# Altium PCB PCB2.PcbDoc
Units mm, origin at the board's own origin, x right, y up, seen from the top; angles counter-clockwise.
Board outline 56.39 x 61.85 mm, 2 copper layers (Top Layer, Bottom Layer); 8 components, 12 nets, 71 pads, 2 vias.
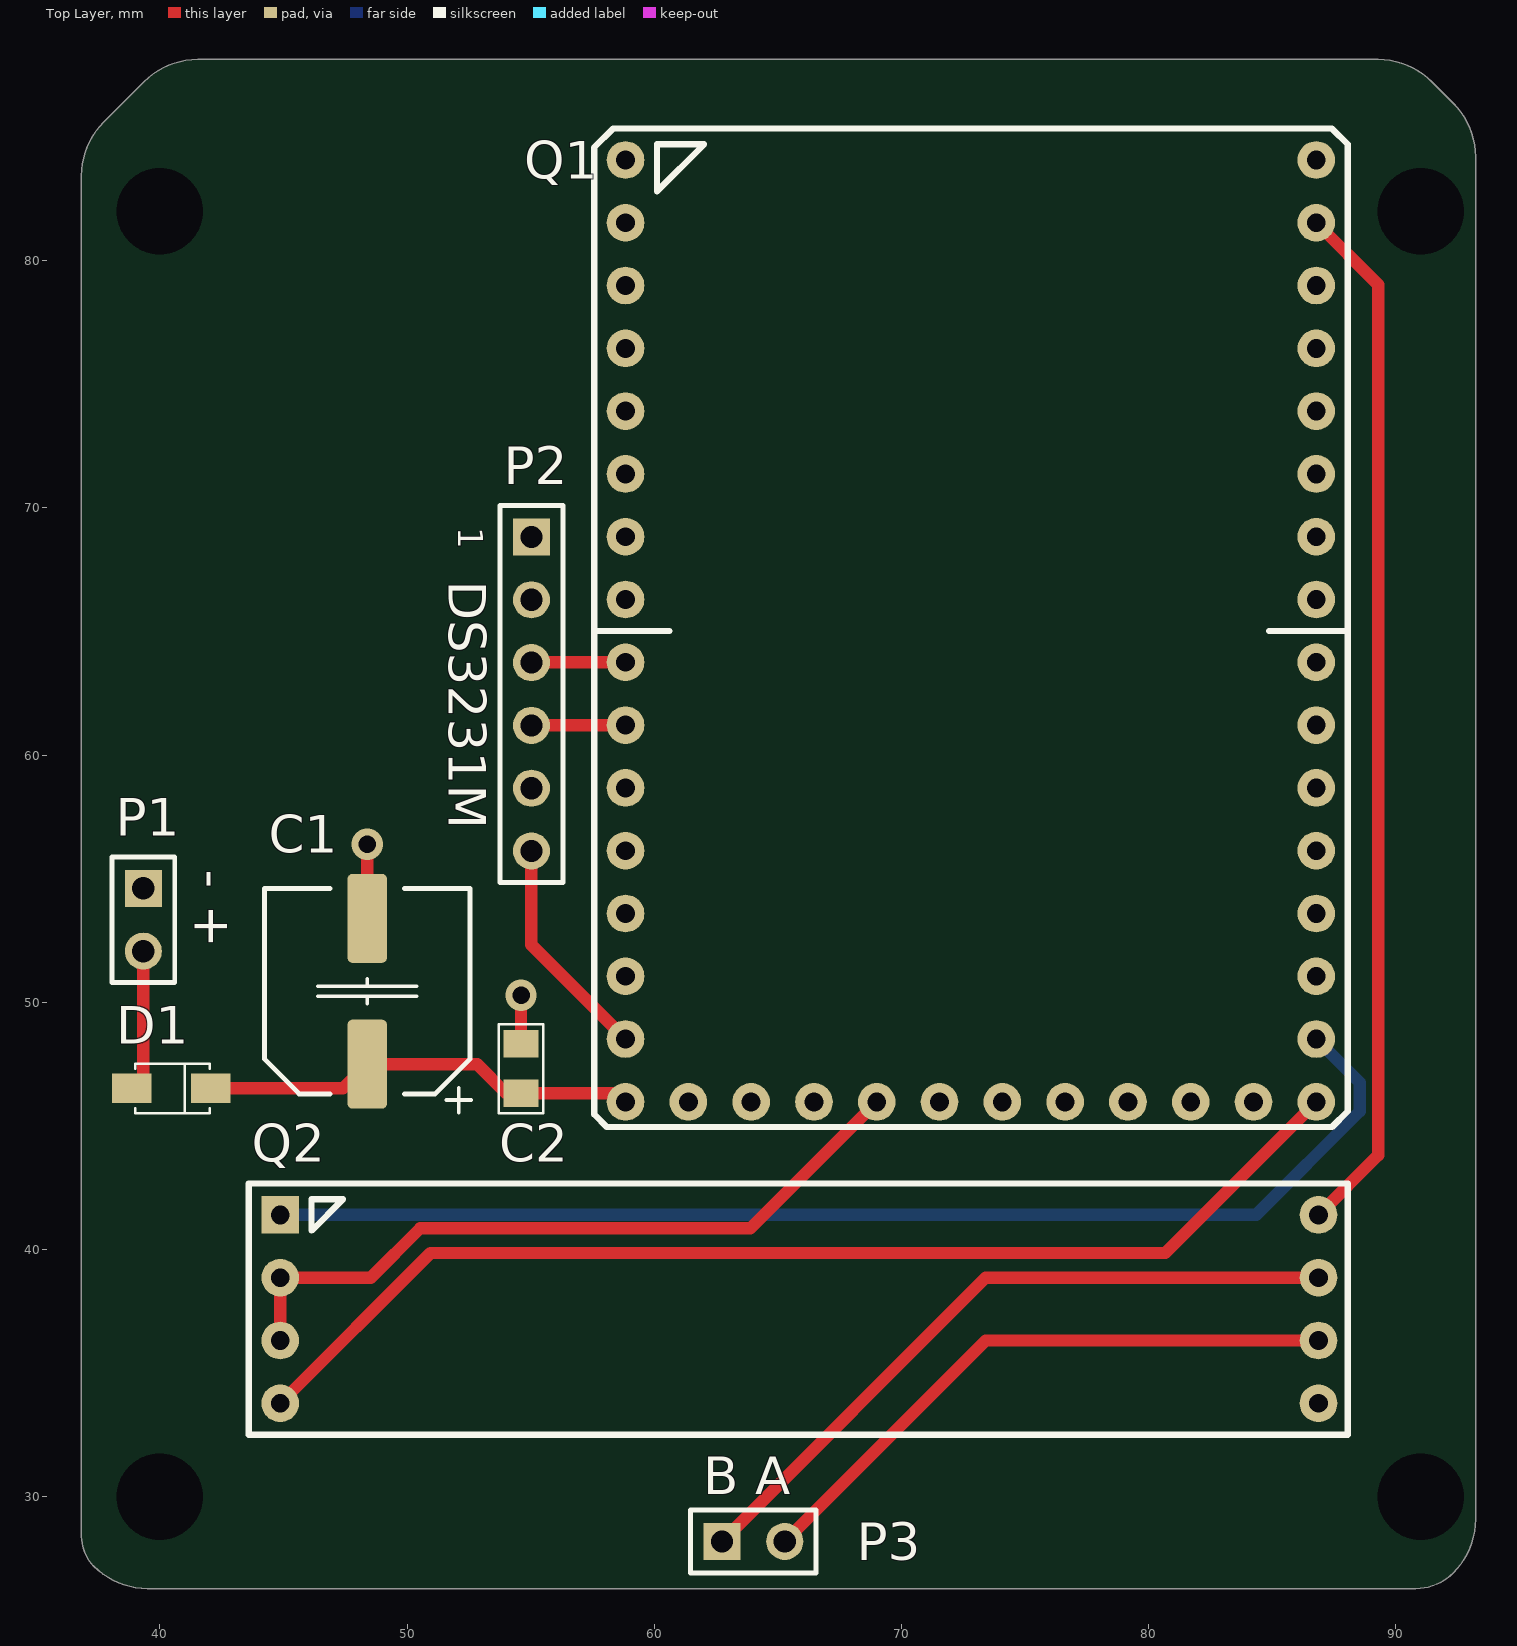
[diagram p0: Top Layer view]
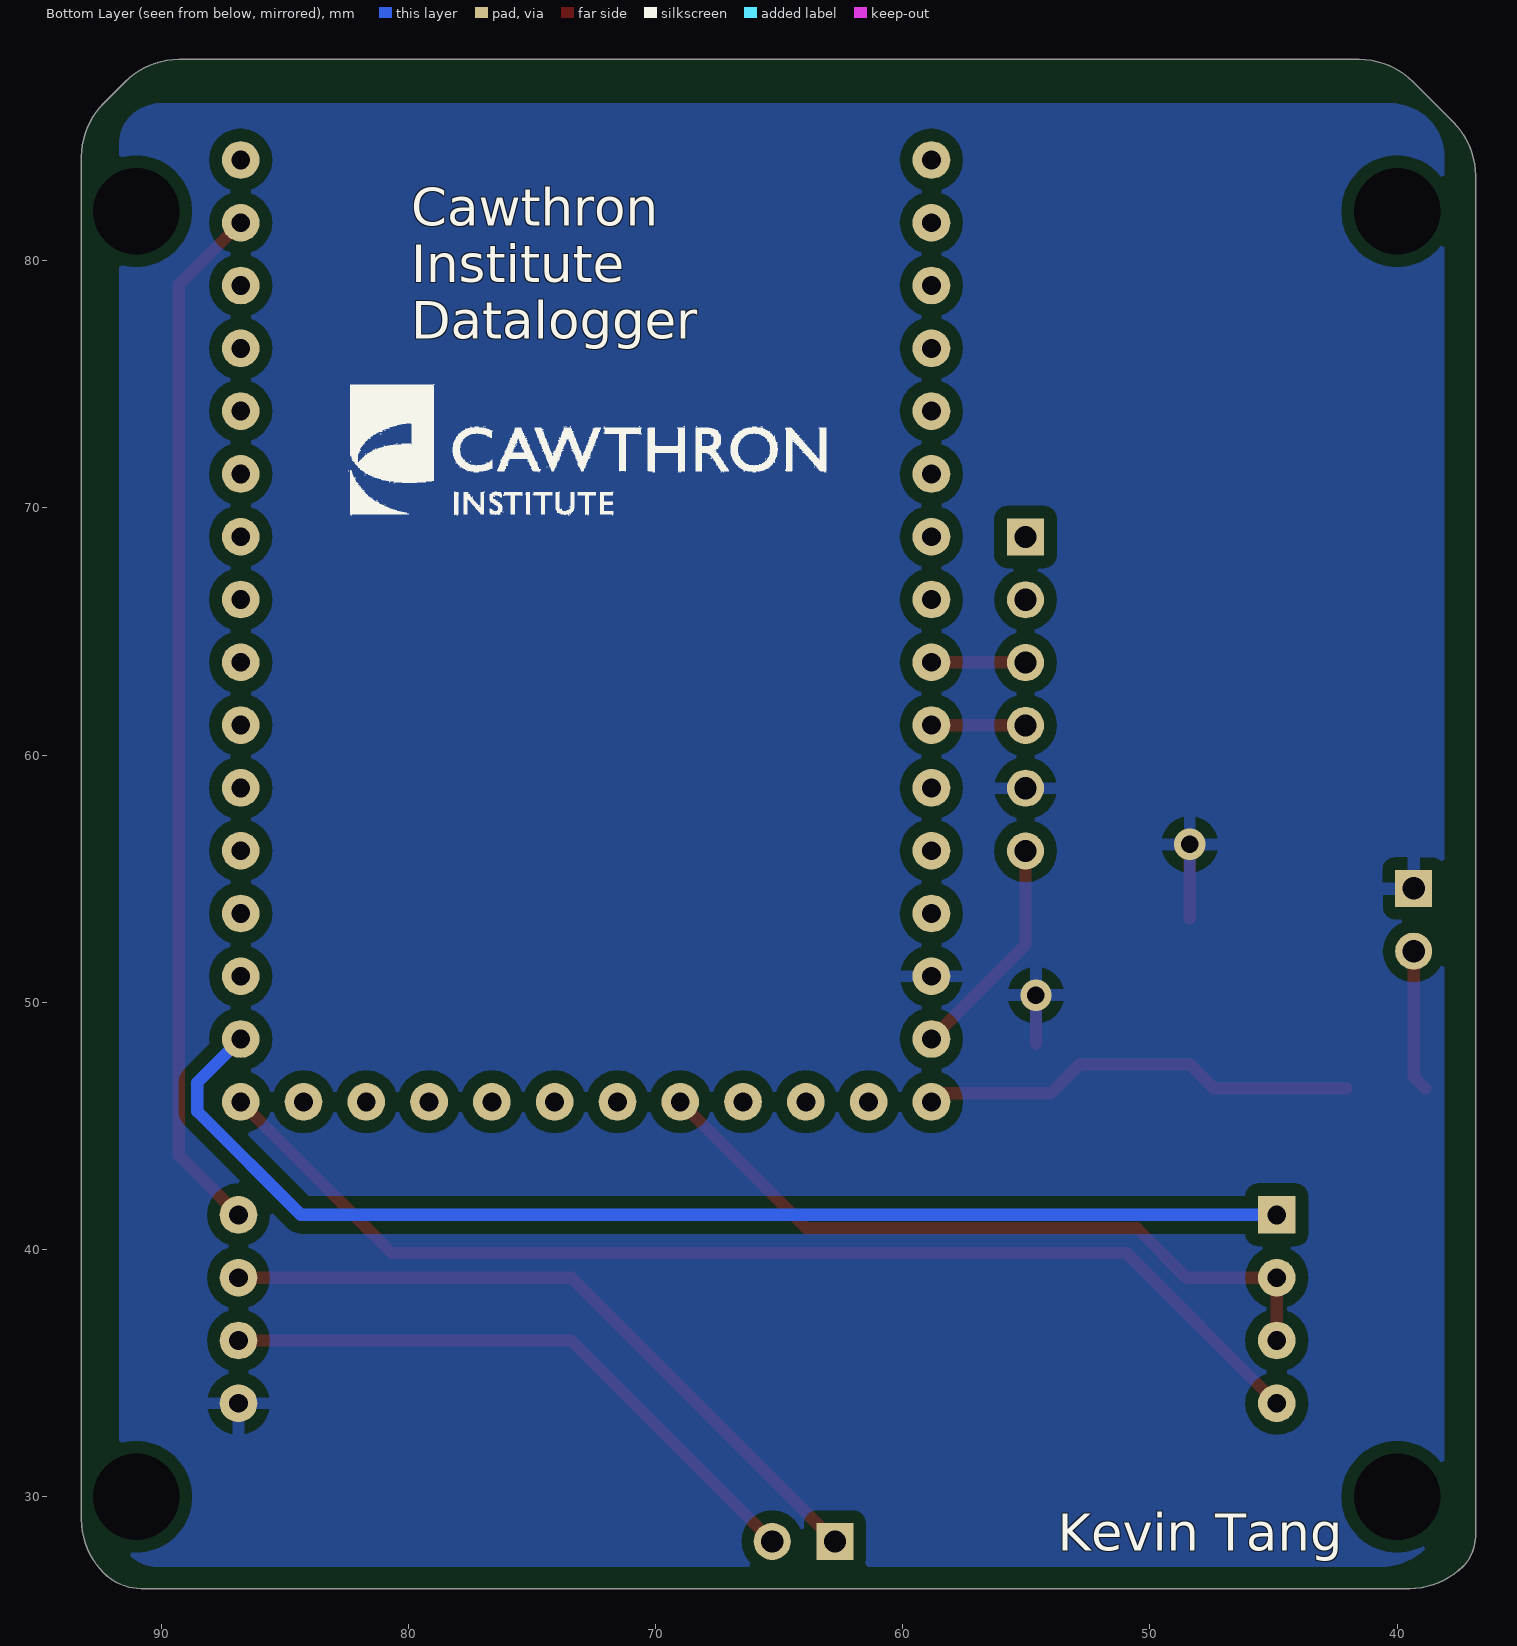
[diagram p1: Bottom Layer view, seen from below]

## Layer stack, top to bottom
Top Solder: solder mask 0.0102, Solder Resist, Dk 3.5
Top Layer: signal copper 0.0356
Dielectric 1: dielectric 0.32, FR-4, Dk 4.8
Bottom Layer: signal copper 0.0356
Bottom Solder: solder mask 0.0102, Solder Resist, Dk 3.5

## Board outline
37.329,27.187 cw(c38.534,28.392) 36.83,28.392 36.83,83.439 cw(c39.896,83.439) 37.728,85.607 39.361,87.24 cw(c41.529,85.072) 41.529,88.138 89.281,88.138 cw(c89.281,85.072) 91.449,87.24 92.32,86.369 cw(c90.152,84.201) 93.218,84.201 93.218,29.083 cw(c90.152,29.083) 92.32,26.915 cw(c90.809,28.426) 90.809,26.289 39.497,26.289 cw(c39.497,29.355)

## Design rules (kind name [scope] priority, off if disabled: settings)
Clearance [All] p1: gap=0.5 ignorepadtopadclearanceinfootprint=FALSE
HoleSize [All] p1: absolutevalues=TRUE maxlimit=6 minlimit=0.025 maxpercent=80.000 minpercent=20.000
PolygonConnect [All] p1: connectstyle=Relief reliefconductorwidth=0.5 reliefentries=4 polygonreliefangle="90 Angle" airgapwidth=0.5
RoutingVias [All] p1: holewidth=0.7 width=1.7 viastyle="Through Hole" minholewidth=0.6 minwidth=1.2 maxholewidth=1 maxwidth=2.2
SilkToSilkClearance [All] p1: silktosilkclearance=0.1
SilkToSolderMaskClearance [IsPad] p1: minsilkscreentomaskgap=0.1 clearancetoexposedcopper=TRUE
SolderMaskExpansion [All] p1: expansion=0.102
Width [All] p1: maxlimit=0.7 minlimit=0.5 preferedwidth=0.5
27 further rules are at their usual default settings.

## Components (designator, comment, footprint, x,y, rotation, side; value= is the part's Value field where it differs from the comment)
C1 "CAP ALUM 22UF 20% 50V SMD" "CAP POL 8x5.4mm SMT" 48.387,50.448 r90 top
C2 "100nF" "0805 CAP" 54.61,47.322 r90 top
D1 "1N4148W-7-F" SOD123 40.513,46.522 r0 top
P1 "Battery" HDR1X2 39.331,54.61 r270 top
P2 "DS3231M" HDR1X6 55.03,68.822 r270 top
P3 "A/B Connector" HDR1X2 62.738,28.194 r0 top
Q1 "PYBv1.1" PCBComponent_1#1 58.838,45.974 r0 top
Q2 "TTL to RS485" PCBComponent_1#2 44.868,33.782 r0 top

## Footprints (in the part's own frame and the unit in brackets; to place one, negate y for a bottom-side part, rotate by r counter-clockwise, add the part's x,y. Pads: shape width x height; smd on the part's side, far side on the other; paste and mask are expansions set on the pad)
"0805 CAP" [mm] "http://www.digikey.co.nz/Web%20Export/Supplier%20Content/Vishay_8026/PDF/VishayBeyschlag_SolderPad.pdf?redirected=1 with dimension G modified by +0.25mm"
  rect 1.1x1.4 smd: 1(-1,0) 2(1,0)
  silkscreen extent -1.8,-0.9 1.8,0.9, body extent -1.04,-0.66 1.04,0.66, height 0.61
"CAP POL 8x5.4mm SMT" [mm]
  round 0.508 on Mech15: 0(0,0)
  rrect25% 3.6x1.6 smd: 1(-2.95,0) 2(2.95,0)
  silkscreen extent -4.9,-4.2 4.15,4.15, body extent -4.5,-4.15 4.5,4.15, height 5.4
HDR1X2 [mm] "Connector; Header; 2 Position"
  rect 1.5x1.5 hole 0.9: 1(0,0)
  round 1.5 hole 0.9: 2(2.54,0)
  silkscreen extent -1.27,-1.27 3.81,1.27
HDR1X6 [mm] "Connector; Header; 6 Position"
  rect 1.5x1.5 hole 0.9: 1(0,0)
  round 1.5 hole 0.9: 2(2.54,0) 3(5.08,0) 4(7.62,0) 5(10.16,0) 6(12.7,0)
  silkscreen extent -1.27,-1.27 13.97,1.27
PCBComponent_1#1 [mil]
  round 60 hole 30: 1(0,1500) 2(0,1400) 3(0,1300) 4(0,1200) 5(0,1100) 6(0,1000) 7(0,900) 8(0,800) 9(0,700) 10(0,600) 11(0,500) 12(0,400) 13(0,300) 14(0,200) 15(0,100) 16(0,0) 17(1100,1500) 18(1100,1400) 19(1100,1300) 20(1100,1200) 21(1100,1100) 22(1100,1000) 23(1100,900) 24(1100,800) 25(1100,700) 26(1100,600) 27(1100,500) 28(1100,400) 29(1100,300) 30(1100,200) 31(1100,100) 32(1100,0) 33(100,0) 34(200,0) 35(300,0) 36(400,0) 37(500,0) 38(600,0) 39(700,0) 40(800,0) 41(900,0) 42(1000,0)
  silkscreen extent -50,-40 1150,1550
PCBComponent_1#2 [mil]
  rect 60x60 hole 30: 1(0,300)
  round 60 hole 30: 2(0,200) 4(0,0) 5(1653.54,300) 6(1653.54,200) 7(1653.54,100) 8(1653.54,0)
  round 60 hole 30 mask+4: 3(0,100)
  silkscreen extent -50,-50 1700,350
SOD123 [mm] "SOD-123; 2 Leads; Body 2.7 x 1.6 mm, (LxW)"
  rect 1.6x1.2 smd: 1(-1.65,0) 2(1.55,0)
  silkscreen extent -1.5,-1 1.5,1, body extent -1.8,-0.86 1.8,0.86, height 1.21

## Part data
C1: library part "SMT-CAP 22uF/35V SM", Capacitance 1="47 µF", ESR (Equivalent Series Resistance)=-, Lifetime @ Temp.="2000 Hrs @ 85°C", Manufacturer=Nichicon, Manufacturer Part Number=UWX1V220MCL1GB, Operating Temperature="-40°C ~ 85°C", Package / Case="Radial, Can - SMD", Supplier Part Number 1=493-2118-1-ND, Tolerance=±20%, Applications="General Purpose", Category=Capacitors, ComponentLink1Description=http://nichicon-us.com/english/products/pdfs/e-uwx.pdf, ComponentLink1URL=http://nichicon-us.com/english/products/pdfs/e-uwx.pdf, Height - Seated (Max)="0.213\" (5.40mm)", Lead Spacing=-, Mounting Type="Surface Mount", Packaging="Cut Tape (CT)", Part Status=Active, Polarization=Polar, Pricing 1="1=0.59, 10=0.406, 100=0.2304, 500=0.16268 (NZD)", Ratings=-, Revision="July-2002: Re-released for DXP Platform.", RoHS="RoHS Compliant", Size / Dimension="0.248\" Dia (6.30mm)", Stock 1=680, Supplier 1=Digi-Key, Surface Mount Land Size="0.260\" L x 0.260\" W (6.60mm x 6.60mm)"
C2: library part "SMT- Cap", "SMT Capacitor Non Polarised"
D1: library part "SMT-Diode 1N4148W-7-F", "DIODE GEN PURP 100V 300MA SOD123", Base Part Number=1N4148W, Capacitance @ Vr, F="2pF @ 0V, 1MHz", Current - Average Rectified (Io)=150mA, Manufacturer="Diodes Incorporated", Manufacturer Part Number=1N4148W-13-F, Operating Temperature - Junction="-65°C ~ 150°C", Package / Case=SOD-123, Supplier Part Number 1=1N4148W-13FDICT-ND, Category="Discrete Semiconductor Products", ComponentLink1Description=https://www.diodes.com/assets/Datasheets/ds30086.pdf, ComponentLink1URL=https://www.diodes.com/assets/Datasheets/ds30086.pdf, Diode Type=Standard, Mounting Type="Surface Mount", Packaging="Cut Tape (CT)", Part Status=Active, Pricing 1="1=0.33, 10=0.292, 100=0.1586, 500=0.0976, 1000=0.06656 (NZD)", RoHS="RoHS Compliant", Speed="Small Signal =< 200mA (Io), Any Speed", Stock 1=5282, Supplier 1=Digi-Key, Supplier Device Package=SOD-123
P1 P3: library part "Header 2", "Header, 2-Pin", LatestRevisionDate=17-Jul-2002, LatestRevisionNote="Re-released for DXP Platform.", Publisher="Altium Limited"
P2: library part "Header 6", "Header, 6-Pin", LatestRevisionDate=17-Jul-2002, LatestRevisionNote="Re-released for DXP Platform.", Publisher="Altium Limited"
Q1: "Microcontroller"
Q2: "Converter"

## Free pads (board coordinates)
  round 1.524 hole 3.5: 1(40,82) 2(91,82) 3(40,30) 4(91,30)

## Via types
v1: diameter 1.27, hole 0.711, Top Layer to Bottom Layer, 2 vias

## Nets (pads, with @x,y where several pads share a name; then routed paths per layer and width w, separated by ;. In a path a pad name is that pad's centre, name@x,y a point inside that pad or via, vN(x,y) a via of type N, cw(c..) or ccw(c..) an arc to the next point about the centre after c; other vN are vias at no path point)
GND: C1.2 C2.2 P1.1 P2.5 Q1.14 Q2.8 | length 5
  Top Layer w0.5: C1.2 v1(48.387,56.388) ; C2.2 v1(54.61,50.292)
NetC1_1: C1.1 C2.1 D1.2 Q1.16 | length 17.8
  Top Layer w0.5: D1.2 47.411,46.522 C1.1 52.832,47.498 54.008,46.322 C2.1 58.49,46.322 Q1.16
NetD1_1: D1.1 P1.2 | length 5.7
  Top Layer w0.5: D1.1 39.331,46.99 P1.2
NetP2_3: P2.3 Q1.9 | length 3.8
  Top Layer w0.5: P2.3 55.042,63.754 Q1.9
NetP2_4: P2.4 Q1.10 | length 3.8
  Top Layer w0.5: P2.4 58.826,61.202 Q1.10
NetP3_1: P3.1 Q2.6 | length 28.5
  Top Layer w0.5: P3.1 73.406,38.862 Q2.6
NetP3_2: P3.2 Q2.7 | length 25
  Top Layer w0.5: P3.2 73.406,36.322 Q2.7
NetQ1_31: Q1.31 Q2.1 | length 49.1
  Bottom Layer w0.5: Q2.1 84.344,41.402 88.535,45.593 88.535,46.757 Q1.31
NetQ1_32: Q1.32 Q2.4 | length 47
  Top Layer w0.5: Q2.4 50.948,39.862 80.666,39.862 Q1.32
NetQ1_36: Q1.36 Q2.2 Q2.3 | length 29.6
  Top Layer w0.5: Q2.3 Q2.2 48.534,38.862 50.534,40.862 63.886,40.862 Q1.36
VCC: P2.6 Q1.15 | length 9.2
  Top Layer w0.5: P2.6 55.03,52.322 Q1.15
VCC1: Q1.18 Q2.5 | length 42.2
  Top Layer w0.5: Q1.18 89.281,79.031 89.281,43.815 Q2.5
pads on no net: C1.0 P2.1 P2.2 Q1.1 Q1.2 Q1.3 Q1.4 Q1.5 Q1.6 Q1.7 Q1.8 Q1.11 Q1.12 Q1.13 Q1.17 Q1.19 Q1.20 Q1.21 Q1.22 Q1.23 Q1.24 Q1.25 Q1.26 Q1.27 Q1.28 Q1.29 Q1.30 Q1.33 Q1.34 Q1.35 Q1.37 Q1.38 Q1.39 Q1.40 Q1.41 Q1.42

## Polygon pours and split planes (outlines as drawn)
GND on Bottom Layer "GND Plane" (solid, pour order 4): 38.1,84.201 38.1,29.718 ccw(c40.64,29.718) 40.64,27.178 90.17,27.178 ccw(c90.17,28.702) 91.694,28.702 91.694,84.709 ccw(c90.043,84.709) 90.043,86.36 40.259,86.36 ccw(c40.259,84.201)

## Silkscreen, mask and mechanical layers (free items; w line width, h text height)
Top Overlay:
  text "1" at 52.07,69.215 h1 r270
  text "DS3231M" at 51.689,67.056 h1.52 r270
  text "- +" at 41.402,55.372 h1.52 r270
  text "B A" at 61.976,30.099 h1.52
Bottom Overlay:
  drawing of 1887 lines, arcs and shapes, not listed
  text "Cawthron / Institute / Datalogger" at 79.883,76.835 h1.52
  text "Kevin Tang" at 53.721,27.813 h1.5
Mechanical 1:
  lines w0.254: 36.83,28.392 ccw(c38.534,28.392) 37.329,27.187 ccw(c39.497,29.355) 39.497,26.289 90.809,26.289 ccw(c90.809,28.426) 92.32,26.915 ccw(c90.152,29.083) 93.218,29.083 93.218,84.201 ccw(c90.152,84.201) 92.32,86.369 91.449,87.24 ccw(c89.281,85.072) 89.281,88.138 71.374,88.138 41.529,88.138 ccw(c41.529,85.072) 39.361,87.24 37.728,85.607 ccw(c39.896,83.439) 36.83,83.439 36.83,81.153 36.83,28.392